# EAGLE board ArrayF_v0zp (EAGLE 7.5.0)

No outline drawn. Coordinates in mm, seen from the top.
Copper layers (1*16): Top 0.035mm / dielectric 1.5mm / Bottom 0.035mm
Design rules "default": minimum track width 10mil, minimum drill 24mil, track to track 8mil, track to pad 8mil, pad to pad 8mil, via to via 8mil, smd to smd 8mil, copper to edge 40mil, drill to drill 8mil, minimum pad ring 10mil, minimum via ring 8mil, stop-mask expansion 4mil, vias tented up to drill 0mil, thermal gap 10mil

## Footprints (pad centres in the part's own frame; a part is rotated, then mirrored left to right if it is on the bottom)
KB_RGBLED_APTF1616 = smd 0.7 x 0.4: P1 0.42,-0.65; P2 0.42,0.66; P3 -0.42,0.66; P4 -0.415,-0.65

## Placement (x,y rotation side)
LED00  KB_APTF1616V0  [KB_RGBLED_APTF1616]  -13.6,-11.7 0 top
LED01  KB_APTF1616V0  [KB_RGBLED_APTF1616]  -15.5,-11.75 0 top
LED02  KB_APTF1616V0  [KB_RGBLED_APTF1616]  -17.4,-11.8 0 top
LED03  KB_APTF1616V0  [KB_RGBLED_APTF1616]  -19.3,-11.85 0 top
LED04  KB_APTF1616V0  [KB_RGBLED_APTF1616]  -21.2,-11.9 0 top
LED05  KB_APTF1616V0  [KB_RGBLED_APTF1616]  -23.1,-11.95 0 top
LED06  KB_APTF1616V0  [KB_RGBLED_APTF1616]  -25,-12 0 top
LED07  KB_APTF1616V0  [KB_RGBLED_APTF1616]  -26.9,-12.05 0 top
LED08  KB_APTF1616V0  [KB_RGBLED_APTF1616]  -28.8,-12.1 0 top
LED09  KB_APTF1616V0  [KB_RGBLED_APTF1616]  -30.7,-12.15 0 top
LED10  KB_APTF1616V0  [KB_RGBLED_APTF1616]  -32.6,-12.2 0 top
LED11  KB_APTF1616V0  [KB_RGBLED_APTF1616]  -34.5,-12.25 0 top
LED12  KB_APTF1616V0  [KB_RGBLED_APTF1616]  -36.4,-12.3 0 top
LED13  KB_APTF1616V0  [KB_RGBLED_APTF1616]  -38.3,-12.35 0 top
LED14  KB_APTF1616V0  [KB_RGBLED_APTF1616]  -40.2,-12.4 0 top
LED15  KB_APTF1616V0  [KB_RGBLED_APTF1616]  -42.1,-12.45 0 top
LED16  KB_APTF1616V0  [KB_RGBLED_APTF1616]  -44,-12.5 0 top
LED17  KB_APTF1616V0  [KB_RGBLED_APTF1616]  -45.9,-12.55 0 top
LED18  KB_APTF1616V0  [KB_RGBLED_APTF1616]  -47.8,-12.6 0 top
LED19  KB_APTF1616V0  [KB_RGBLED_APTF1616]  -49.7,-12.65 0 top
LED20  KB_APTF1616V0  [KB_RGBLED_APTF1616]  -51.6,-12.7 0 top
LED21  KB_APTF1616V0  [KB_RGBLED_APTF1616]  -53.5,-12.75 0 top
LED22  KB_APTF1616V0  [KB_RGBLED_APTF1616]  -55.4,-12.8 0 top
LED23  KB_APTF1616V0  [KB_RGBLED_APTF1616]  -57.3,-12.85 0 top
LED24  KB_APTF1616V0  [KB_RGBLED_APTF1616]  -59.2,-12.9 0 top
LED25  KB_APTF1616V0  [KB_RGBLED_APTF1616]  -61.1,-12.95 0 top
LED26  KB_APTF1616V0  [KB_RGBLED_APTF1616]  -63,-13 0 top
LED27  KB_APTF1616V0  [KB_RGBLED_APTF1616]  -64.9,-13.05 0 top
LED28  KB_APTF1616V0  [KB_RGBLED_APTF1616]  -66.8,-13.1 0 top
LED29  KB_APTF1616V0  [KB_RGBLED_APTF1616]  -68.7,-13.15 0 top
LED30  KB_APTF1616V0  [KB_RGBLED_APTF1616]  -70.6,-13.2 0 top
LED31  KB_APTF1616V0  [KB_RGBLED_APTF1616]  -72.5,-13.25 0 top
LED32  KB_APTF1616V0  [KB_RGBLED_APTF1616]  -74.4,-13.3 0 top
LED33  KB_APTF1616V0  [KB_RGBLED_APTF1616]  -76.3,-13.35 0 top
LED34  KB_APTF1616V0  [KB_RGBLED_APTF1616]  -78.2,-13.4 0 top
LED35  KB_APTF1616V0  [KB_RGBLED_APTF1616]  -80.1,-13.45 0 top
LED36  KB_APTF1616V0  [KB_RGBLED_APTF1616]  -82,-13.5 0 top
LED37  KB_APTF1616V0  [KB_RGBLED_APTF1616]  -83.9,-13.55 0 top
LED38  KB_APTF1616V0  [KB_RGBLED_APTF1616]  -85.8,-13.6 0 top
LED39  KB_APTF1616V0  [KB_RGBLED_APTF1616]  -87.7,-13.65 0 top
LED40  KB_APTF1616V0  [KB_RGBLED_APTF1616]  -89.6,-13.7 0 top
LED41  KB_APTF1616V0  [KB_RGBLED_APTF1616]  -91.5,-13.75 0 top
LED42  KB_APTF1616V0  [KB_RGBLED_APTF1616]  -93.4,-13.8 0 top
LED43  KB_APTF1616V0  [KB_RGBLED_APTF1616]  -95.3,-13.85 0 top
LED44  KB_APTF1616V0  [KB_RGBLED_APTF1616]  -97.2,-13.9 0 top
LED45  KB_APTF1616V0  [KB_RGBLED_APTF1616]  -99.1,-13.95 0 top
LED46  KB_APTF1616V0  [KB_RGBLED_APTF1616]  -101,-14 0 top
LED47  KB_APTF1616V0  [KB_RGBLED_APTF1616]  -102.9,-14.05 0 top
LED48  KB_APTF1616V0  [KB_RGBLED_APTF1616]  -104.8,-14.1 0 top
LED49  KB_APTF1616V0  [KB_RGBLED_APTF1616]  -106.7,-14.15 0 top
LED50  KB_APTF1616V0  [KB_RGBLED_APTF1616]  -108.6,-14.2 0 top
LED51  KB_APTF1616V0  [KB_RGBLED_APTF1616]  -110.5,-14.25 0 top
LED52  KB_APTF1616V0  [KB_RGBLED_APTF1616]  -112.4,-14.3 0 top
LED53  KB_APTF1616V0  [KB_RGBLED_APTF1616]  -114.3,-14.35 0 top
LED54  KB_APTF1616V0  [KB_RGBLED_APTF1616]  -116.2,-14.4 0 top
LED55  KB_APTF1616V0  [KB_RGBLED_APTF1616]  -118.1,-14.45 0 top
LED56  KB_APTF1616V0  [KB_RGBLED_APTF1616]  -120,-14.5 0 top
LED57  KB_APTF1616V0  [KB_RGBLED_APTF1616]  -121.9,-14.55 0 top
LED58  KB_APTF1616V0  [KB_RGBLED_APTF1616]  -123.8,-14.6 0 top
LED59  KB_APTF1616V0  [KB_RGBLED_APTF1616]  -125.7,-14.65 0 top
LED60  KB_APTF1616V0  [KB_RGBLED_APTF1616]  -127.6,-14.7 0 top
LED61  KB_APTF1616V0  [KB_RGBLED_APTF1616]  -129.5,-14.75 0 top
LED62  KB_APTF1616V0  [KB_RGBLED_APTF1616]  -131.4,-14.8 0 top
LED63  KB_APTF1616V0  [KB_RGBLED_APTF1616]  -133.3,-14.85 0 top
LED64  KB_APTF1616V0  [KB_RGBLED_APTF1616]  -135.2,-14.9 0 top
LED65  KB_APTF1616V0  [KB_RGBLED_APTF1616]  -137.1,-14.95 0 top
LED66  KB_APTF1616V0  [KB_RGBLED_APTF1616]  -139,-15 0 top
LED67  KB_APTF1616V0  [KB_RGBLED_APTF1616]  -140.9,-15.05 0 top
LED68  KB_APTF1616V0  [KB_RGBLED_APTF1616]  -142.8,-15.1 0 top
LED69  KB_APTF1616V0  [KB_RGBLED_APTF1616]  -144.7,-15.15 0 top
LED70  KB_APTF1616V0  [KB_RGBLED_APTF1616]  -146.6,-15.2 0 top
LED71  KB_APTF1616V0  [KB_RGBLED_APTF1616]  -148.5,-15.25 0 top
LED72  KB_APTF1616V0  [KB_RGBLED_APTF1616]  -150.4,-15.3 0 top
LED73  KB_APTF1616V0  [KB_RGBLED_APTF1616]  -152.3,-15.35 0 top
LED74  KB_APTF1616V0  [KB_RGBLED_APTF1616]  -154.2,-15.4 0 top
LED75  KB_APTF1616V0  [KB_RGBLED_APTF1616]  -156.1,-15.45 0 top
LED76  KB_APTF1616V0  [KB_RGBLED_APTF1616]  -158,-15.5 0 top
LED77  KB_APTF1616V0  [KB_RGBLED_APTF1616]  -159.9,-15.55 0 top
LED78  KB_APTF1616V0  [KB_RGBLED_APTF1616]  -161.8,-15.6 0 top
LED79  KB_APTF1616V0  [KB_RGBLED_APTF1616]  -163.7,-15.65 0 top
LED80  KB_APTF1616V0  [KB_RGBLED_APTF1616]  -165.6,-15.7 0 top
LED81  KB_APTF1616V0  [KB_RGBLED_APTF1616]  -167.5,-15.75 0 top
LED82  KB_APTF1616V0  [KB_RGBLED_APTF1616]  -169.4,-15.8 0 top
LED83  KB_APTF1616V0  [KB_RGBLED_APTF1616]  -171.3,-15.85 0 top
LED84  KB_APTF1616V0  [KB_RGBLED_APTF1616]  -173.2,-15.9 0 top
LED85  KB_APTF1616V0  [KB_RGBLED_APTF1616]  -175.1,-15.95 0 top
LED86  KB_APTF1616V0  [KB_RGBLED_APTF1616]  -177,-16 0 top
LED87  KB_APTF1616V0  [KB_RGBLED_APTF1616]  -178.9,-16.05 0 top
LED88  KB_APTF1616V0  [KB_RGBLED_APTF1616]  -180.8,-16.1 0 top
LED89  KB_APTF1616V0  [KB_RGBLED_APTF1616]  -182.7,-16.15 0 top
LED90  KB_APTF1616V0  [KB_RGBLED_APTF1616]  -184.6,-16.2 0 top
LED91  KB_APTF1616V0  [KB_RGBLED_APTF1616]  -186.5,-16.25 0 top
LED92  KB_APTF1616V0  [KB_RGBLED_APTF1616]  -188.4,-16.3 0 top
LED93  KB_APTF1616V0  [KB_RGBLED_APTF1616]  -190.3,-16.35 0 top
LED94  KB_APTF1616V0  [KB_RGBLED_APTF1616]  -192.2,-16.4 0 top
LED95  KB_APTF1616V0  [KB_RGBLED_APTF1616]  -194.1,-16.45 0 top
LED96  KB_APTF1616V0  [KB_RGBLED_APTF1616]  -196,-16.5 0 top
LED97  KB_APTF1616V0  [KB_RGBLED_APTF1616]  -197.9,-16.55 0 top
LED98  KB_APTF1616V0  [KB_RGBLED_APTF1616]  -199.8,-16.6 0 top
LED99  KB_APTF1616V0  [KB_RGBLED_APTF1616]  -201.7,-16.65 0 top
LED100  KB_APTF1616V0  [KB_RGBLED_APTF1616]  -203.6,-16.7 0 top
LED101  KB_APTF1616V0  [KB_RGBLED_APTF1616]  -205.5,-16.75 0 top
LED102  KB_APTF1616V0  [KB_RGBLED_APTF1616]  -207.4,-16.8 0 top
LED103  KB_APTF1616V0  [KB_RGBLED_APTF1616]  -209.3,-16.85 0 top
LED104  KB_APTF1616V0  [KB_RGBLED_APTF1616]  -211.2,-16.9 0 top
LED105  KB_APTF1616V0  [KB_RGBLED_APTF1616]  -213.1,-16.95 0 top
LED106  KB_APTF1616V0  [KB_RGBLED_APTF1616]  -215,-17 0 top
LED107  KB_APTF1616V0  [KB_RGBLED_APTF1616]  -216.9,-17.05 0 top
LED108  KB_APTF1616V0  [KB_RGBLED_APTF1616]  -218.8,-17.1 0 top
LED109  KB_APTF1616V0  [KB_RGBLED_APTF1616]  -220.7,-17.15 0 top
LED110  KB_APTF1616V0  [KB_RGBLED_APTF1616]  -222.6,-17.2 0 top
LED111  KB_APTF1616V0  [KB_RGBLED_APTF1616]  -224.5,-17.25 0 top
LED112  KB_APTF1616V0  [KB_RGBLED_APTF1616]  -226.4,-17.3 0 top
LED113  KB_APTF1616V0  [KB_RGBLED_APTF1616]  -228.3,-17.35 0 top
LED114  KB_APTF1616V0  [KB_RGBLED_APTF1616]  -230.2,-17.4 0 top
LED115  KB_APTF1616V0  [KB_RGBLED_APTF1616]  -232.1,-17.45 0 top
LED116  KB_APTF1616V0  [KB_RGBLED_APTF1616]  -234,-17.5 0 top
LED117  KB_APTF1616V0  [KB_RGBLED_APTF1616]  -235.9,-17.55 0 top
LED118  KB_APTF1616V0  [KB_RGBLED_APTF1616]  -237.8,-17.6 0 top
LED119  KB_APTF1616V0  [KB_RGBLED_APTF1616]  -239.7,-17.65 0 top
LED120  KB_APTF1616V0  [KB_RGBLED_APTF1616]  -241.6,-17.7 0 top
LED121  KB_APTF1616V0  [KB_RGBLED_APTF1616]  -243.5,-17.75 0 top
LED122  KB_APTF1616V0  [KB_RGBLED_APTF1616]  -245.4,-17.8 0 top
LED123  KB_APTF1616V0  [KB_RGBLED_APTF1616]  -247.3,-17.85 0 top
LED124  KB_APTF1616V0  [KB_RGBLED_APTF1616]  -249.2,-17.9 0 top
LED125  KB_APTF1616V0  [KB_RGBLED_APTF1616]  -251.1,-17.95 0 top
LED126  KB_APTF1616V0  [KB_RGBLED_APTF1616]  -253,-18 0 top
LED127  KB_APTF1616V0  [KB_RGBLED_APTF1616]  -254.9,-18.05 0 top
LED128  KB_APTF1616V0  [KB_RGBLED_APTF1616]  -256.8,-18.1 0 top
LED129  KB_APTF1616V0  [KB_RGBLED_APTF1616]  -258.7,-18.15 0 top
LED130  KB_APTF1616V0  [KB_RGBLED_APTF1616]  -260.6,-18.2 0 top
LED131  KB_APTF1616V0  [KB_RGBLED_APTF1616]  -262.5,-18.25 0 top
LED132  KB_APTF1616V0  [KB_RGBLED_APTF1616]  -264.4,-18.3 0 top
LED133  KB_APTF1616V0  [KB_RGBLED_APTF1616]  -266.3,-18.35 0 top
LED134  KB_APTF1616V0  [KB_RGBLED_APTF1616]  -268.2,-18.4 0 top
LED135  KB_APTF1616V0  [KB_RGBLED_APTF1616]  -270.1,-18.45 0 top
LED136  KB_APTF1616V0  [KB_RGBLED_APTF1616]  -272,-18.5 0 top
LED137  KB_APTF1616V0  [KB_RGBLED_APTF1616]  -273.9,-18.55 0 top
LED138  KB_APTF1616V0  [KB_RGBLED_APTF1616]  -275.8,-18.6 0 top
LED139  KB_APTF1616V0  [KB_RGBLED_APTF1616]  -277.7,-18.65 0 top
LED140  KB_APTF1616V0  [KB_RGBLED_APTF1616]  -279.6,-18.7 0 top
LED141  KB_APTF1616V0  [KB_RGBLED_APTF1616]  -281.5,-18.75 0 top
LED142  KB_APTF1616V0  [KB_RGBLED_APTF1616]  -283.4,-18.8 0 top
LED143  KB_APTF1616V0  [KB_RGBLED_APTF1616]  -285.3,-18.85 0 top
LED144  KB_APTF1616V0  [KB_RGBLED_APTF1616]  -287.2,-18.9 0 top
LED145  KB_APTF1616V0  [KB_RGBLED_APTF1616]  -289.1,-18.95 0 top
LED146  KB_APTF1616V0  [KB_RGBLED_APTF1616]  -291,-19 0 top
LED147  KB_APTF1616V0  [KB_RGBLED_APTF1616]  -292.9,-19.05 0 top
LED148  KB_APTF1616V0  [KB_RGBLED_APTF1616]  -294.8,-19.1 0 top
LED149  KB_APTF1616V0  [KB_RGBLED_APTF1616]  -296.7,-19.15 0 top
LED150  KB_APTF1616V0  [KB_RGBLED_APTF1616]  -298.6,-19.2 0 top
LED151  KB_APTF1616V0  [KB_RGBLED_APTF1616]  -300.5,-19.25 0 top
LED152  KB_APTF1616V0  [KB_RGBLED_APTF1616]  -302.4,-19.3 0 top
LED153  KB_APTF1616V0  [KB_RGBLED_APTF1616]  -304.3,-19.35 0 top
LED154  KB_APTF1616V0  [KB_RGBLED_APTF1616]  -306.2,-19.4 0 top

## Library data of the parts
LED00 LED01-LED09 LED10-LED154 = WallerLabLib